# EAGLE board 副机 多路式 v0.1 (EAGLE 6.3)
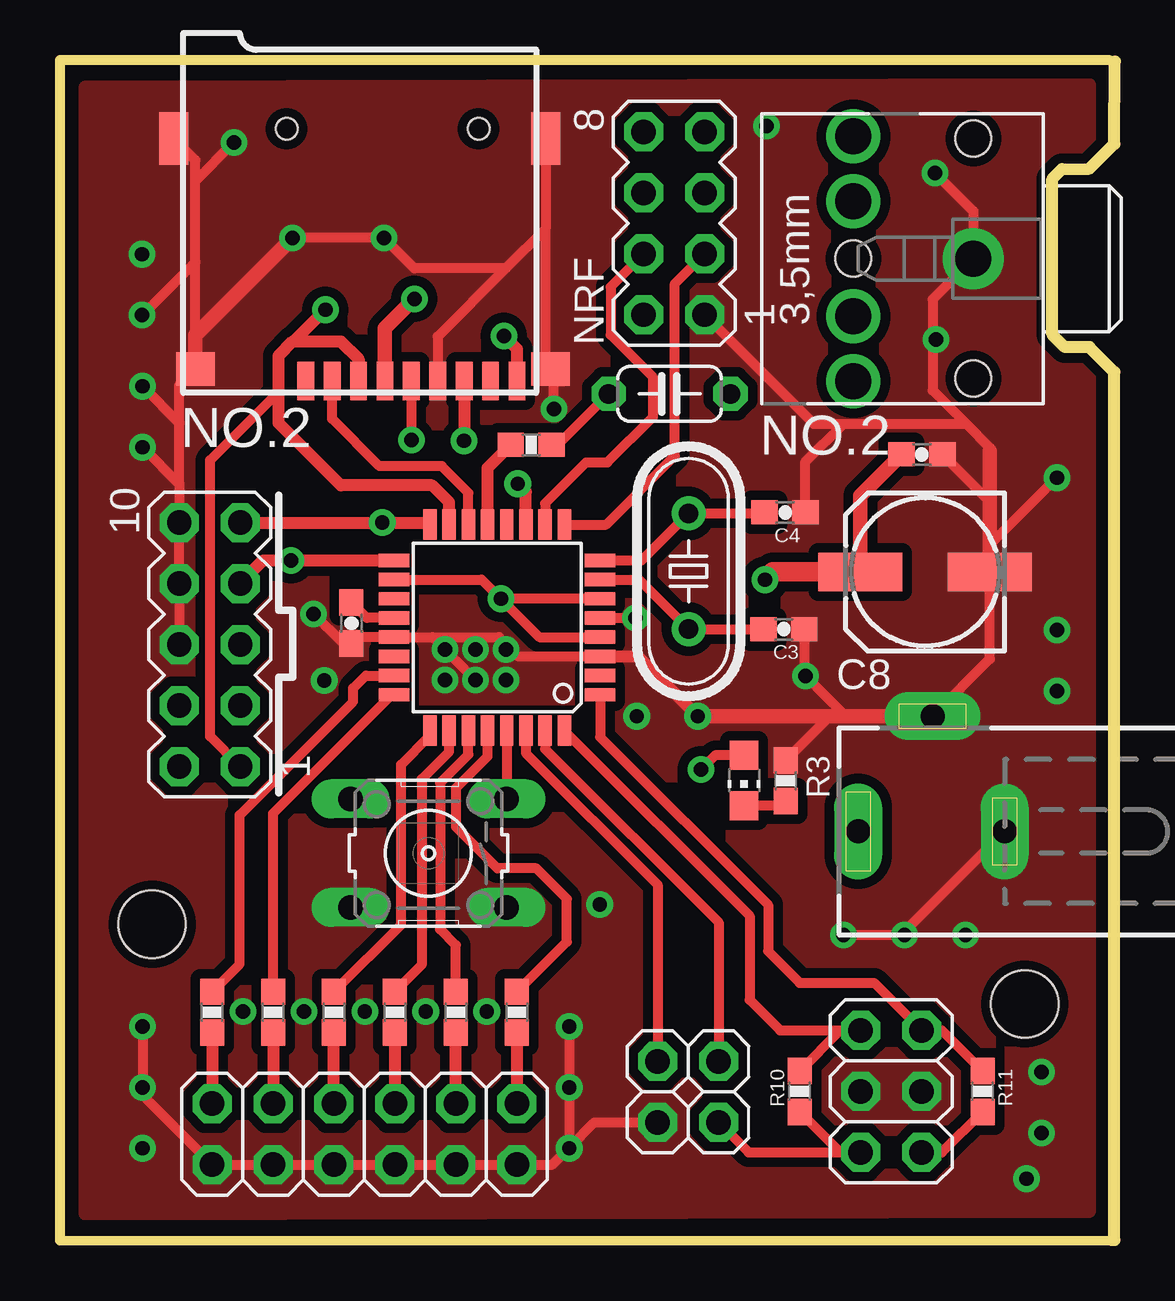
[diagram p0: board, top side]
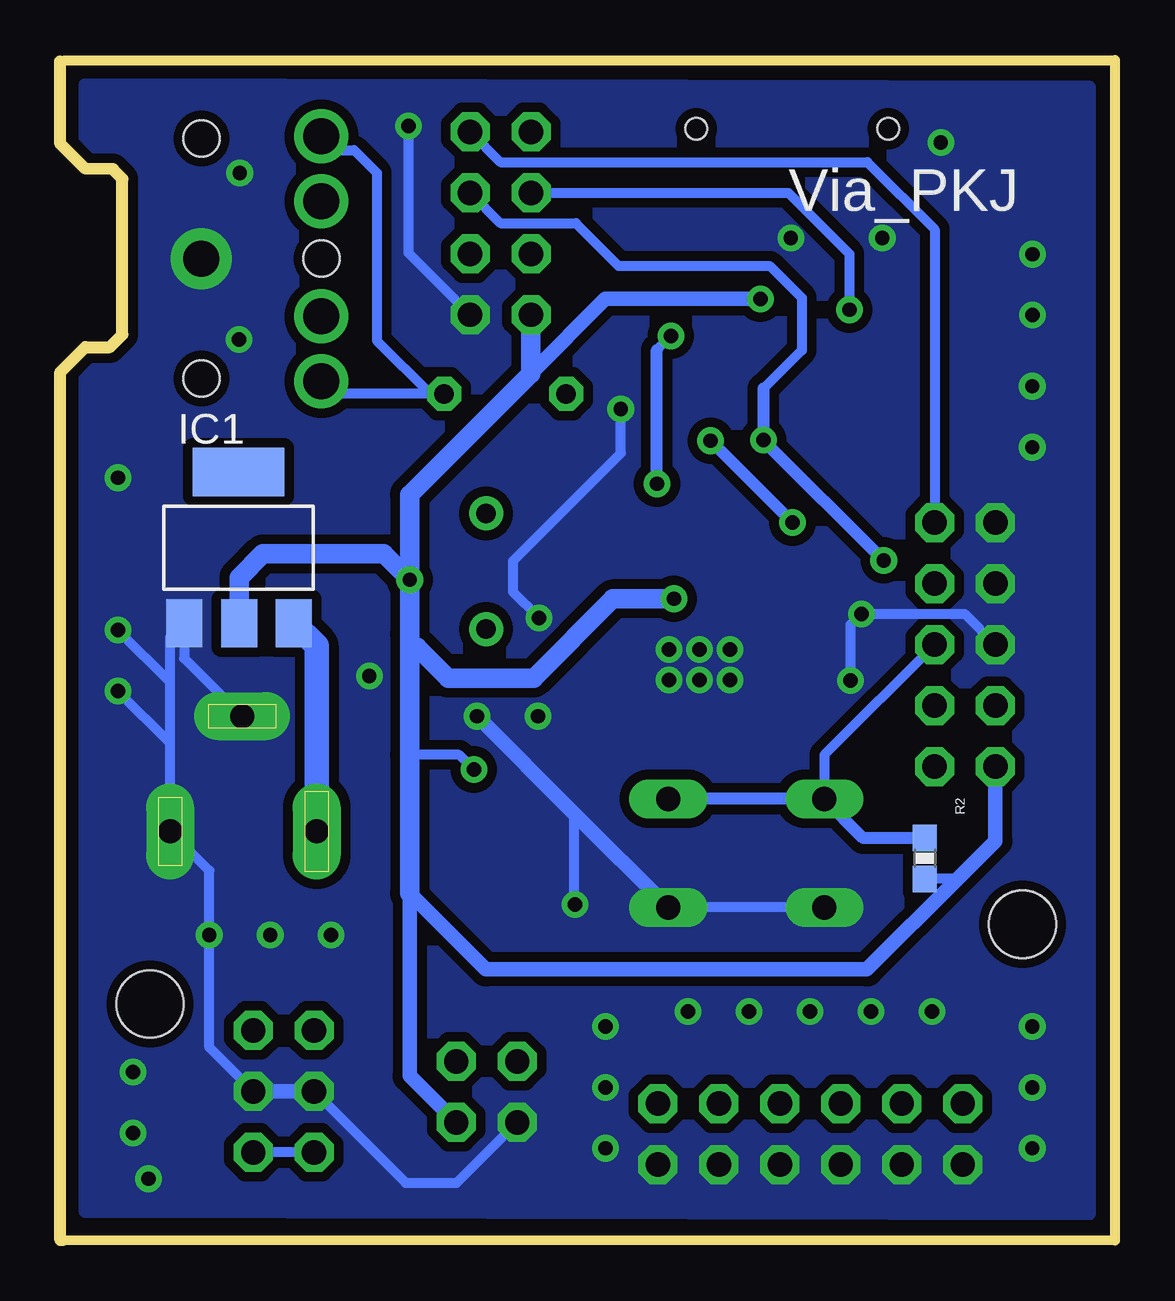
[diagram p1: board, bottom side, seen from below]

Size 43.95 x 49.2 mm. Coordinates in mm from the lower left corner, seen from the top.
Outline: 43.82,0 0,0.02 0,49.2 43.76,49.18
Outline: 43.93,0.04 43.93,36.2 42.89,37.24 41.87,37.24 41.35,37.76 41.35,44.25 41.75,44.65 42.89,44.67 43.93,45.71 43.95,49.15
Copper layers (1*16): Top 0.035mm / dielectric 1.5mm / Bottom 0.035mm
Design rules "SparkFun *": minimum track width 8mil, minimum drill 20mil, track to track 8mil, track to pad 8mil, pad to pad 8mil, via to via 8mil, smd to smd 8mil, copper to edge 10mil, drill to drill 8mil, minimum pad ring 12mil, minimum via ring 10mil, stop-mask expansion 4mil, vias tented up to drill 20mil, thermal gap 10mil
Net classes: 1 power: width 0.381 mm
Holes 2.8 mm at 40.2,9.87 3.84,13.19

## Footprints (pad centres in the part's own frame; a part is rotated, then mirrored left to right if it is on the bottom)
C050-024X044 = drill 0.813 octagon: 1 -2.54,0; 2 2.54,0
0603-RES = smd 1.1 x 1: 1 -0.85,0; 2 0.85,0
0603-CAP = smd 1.1 x 1: 1 -0.85,0; 2 0.85,0
153CLV-0605 = smd 3.5 x 1.6: + 2.7,0; - -2.7,0
SOT223 = smd 1.499 x 2.007: 1 -2.261,-3.15; 2 0.025,-3.15; 3 2.311,-3.15 | smd 3.81 x 2.007: 4 0,3.15
TQFP32-08 = smd 1.27 x 0.559: 1 -4.293,2.8; 2 -4.293,2; 3 -4.293,1.2; 4 -4.293,0.4; 5 -4.293,-0.4; 6 -4.293,-1.2; 7 -4.293,-2; 8 -4.293,-2.8; 17 4.293,-2.8; 18 4.293,-2; 19 4.293,-1.2; 20 4.293,-0.4; 21 4.293,0.4; 22 4.293,1.2; 23 4.293,2; 24 4.293,2.8 | smd 0.559 x 1.27: 9 -2.8,-4.293; 10 -2,-4.293; 11 -1.2,-4.293; 12 -0.4,-4.293; 13 0.4,-4.293; 14 1.2,-4.293; 15 2,-4.293; 16 2.8,-4.293; 25 2.8,4.293; 26 2,4.293; 27 1.2,4.293; 28 0.4,4.293; 29 -0.4,4.293; 30 -1.2,4.293; 31 -2,4.293; 32 -2.8,4.293
DCJ0202 = drill 1 pad 2 long: 1 0,3.1; 2 4.8,0; 3 0,-3
2X03 = drill 1.016 octagon: 1 -2.54,-1.27; 2 -2.54,1.27; 3 0,-1.27; 4 0,1.27; 5 2.54,-1.27; 6 2.54,1.27
2X06 = drill 1.016 octagon: 1 -6.35,-1.27; 2 -6.35,1.27; 3 -3.81,-1.27; 4 -3.81,1.27; 5 -1.27,-1.27; 6 -1.27,1.27; 7 1.27,-1.27; 8 1.27,1.27; 9 3.81,-1.27; 10 3.81,1.27; 11 6.35,-1.27; 12 6.35,1.27
0805-LED = smd 1.2 x 1.2: A 0,-1.05; C 0,1.05
MA04-2 = drill 1.016 octagon: 1 -3.81,-1.27; 2 -3.81,1.27; 3 -1.27,-1.27; 4 -1.27,1.27; 5 1.27,-1.27; 6 1.27,1.27; 7 3.81,-1.27; 8 3.81,1.27
HC49/S = drill 0.813: 1 -2.413,0; 2 2.413,0
B3F-10XX = drill 1.016 long: 1 -3.251,2.261; 2 3.251,2.261; 3 -3.251,-2.261; 4 3.251,-2.261
MA05-2 = drill 1.016 octagon: 1 -5.08,-1.27; 2 -5.08,1.27; 3 -2.54,-1.27; 4 -2.54,1.27; 5 0,-1.27; 6 0,1.27; 7 2.54,-1.27; 8 2.54,1.27; 9 5.08,-1.27; 10 5.08,1.27
MICRO-SD = smd 0.7 x 1.6: 1 2.25,10.5; 2 1.15,10.5; 3 0.05,10.5; 4 -1.05,10.5; 5 -2.15,10.5; 6 -3.25,10.5; 7 -4.35,10.5; 8 -5.45,10.5; CD -6.55,10.5 | smd 1.6 x 1.4: G -7.95,10; P$3 6.85,10 | smd 1.2 x 2.2: P$1 7.75,0.4; P$2 -7.75,0.4 | hole 0.9: 3.05,0; -4.95,0
PIN1 = drill 1.016 octagon: 1 0,0
STX3100 = drill 1.5 pad 2.54: 1 2.7,-0.1 | drill 1.5: 2 7.7,5; 3 7.7,2.3; 4 7.7,-2.5; 5 7.7,-5.2 | hole 1.5: 2.7,4.9; 2.7,-5.1; 7.7,-0.1

## Placement (x,y rotation side)
10U  10u  [C050-024X044]  25.4,35.29 180 top
100  100  [0603-RES]  19.63,33.17 180 top
C1  0.1uf  [0603-CAP]  12.14,25.74 90 top
C2  0.1uf  [0603-CAP]  35.92,32.77 180 top
C3  0.1uf  [0603-CAP]  30.16,25.49 180 top
C4  0.1uf  [0603-CAP]  30.21,30.35 180 top
C8  220uF  [153CLV-0605]  36.05,27.87 180 top
IC1  REG1117  [SOT223]  36.51,28.89 0 bottom
IC2  MEGA8-AI  [TQFP32-08]  18.22,25.55 180 top
J1  DC6~12V  [DCJ0202]  36.36,17.06 90 top
JP1  [2X03]  34.63,6.23 90 top
JP2  [2X06]  12.69,4.45 0 top
LED1  [0805-LED]  28.5,19.18 180 top
NRF  [MA04-2]  25.59,42.4 90 top
Q2  [HC49/S]  26.19,27.9 270 top
R  200  [0603-RES]  6.34,9.53 270 top
R1  200  [0603-RES]  8.88,9.53 270 top
R2  10K  [0603-RES]  7.92,15.94 270 bottom
R3  1K  [0603-RES]  30.23,19.17 270 top
R4  200  [0603-RES]  11.42,9.53 270 top
R5  200  [0603-RES]  13.96,9.53 270 top
R7  200  [0603-RES]  16.5,9.53 270 top
R8  200  [0603-RES]  19.04,9.53 270 top
R10  4.7k  [0603-RES]  30.82,6.23 90 top
R11  4.7k  [0603-RES]  38.44,6.23 270 top
S1  [B3F-10XX]  15.35,16.16 180 top
SV7  [MA05-2]  6.24,24.85 90 top
U$1  MICRO-SD  [MICRO-SD]  12.49,46.34 180 top
U$4  [PIN1]  24.9,4.94 0 top
U$5  [PIN1]  27.44,4.94 0 top
U$6  [PIN1]  27.44,7.48 0 top
U$7  [PIN1]  24.9,7.48 0 top
X1  Sound  [STX3100]  40.75,40.83 180 top

## Library data of the parts
10U C8 = resistor
100 C1-C4 LED1 R R1-R5 R7 R8 R10 R11 U$1 = MY
IC1 = burr-brown; MPN: REG1117; OC_FARNELL: 1097566; OC_NEWARK: 14P6981
IC2 = atmel; MPN: ATMEGA8-16AU; OC_FARNELL: 9171371; OC_NEWARK: 73M8863
J1 = con-jack; OC_FARNELL: unknown; OC_NEWARK: unknown
JP1 JP2 = pinhead
NRF SV7 = con-lstb; OC_FARNELL: unknown; OC_NEWARK: unknown
Q2 = crystal; OC_FARNELL: 1667008; OC_NEWARK: unknown
S1 = switch-omron; MPN: B3F-1000; OC_FARNELL: 176432; OC_NEWARK: 36M3542
U$4-U$7 = pkj
X1 = adafruit

## Nets
A0: IC2.23 R.1
A1: IC2.24 R1.1
A2: IC2.25 R4.1
A3: IC2.26 R5.1
A4: IC2.27 R7.1
A5: IC2.28 R8.1
A6: IC2.19
A7: IC2.22
AREF: C1.2 IC2.20
D0/RXI: IC2.30 U$7.1
D1/TXO: IC2.31 U$6.1
D2/INT0: IC2.32 JP1.6 R10.2
D3/INT1/PMW: IC2.1 JP1.5 R11.1
D4: IC2.2
D5/PWM: IC2.9 NRF.3
D6/PWM: IC2.10 NRF.4
D7: IC2.11 U$1.CD
D8: IC2.12
D9/PWM: 100.2 IC2.13
D10/SS/PWM: IC2.14 U$1.2
D11/MOSI/PWM: IC2.15 NRF.6 SV7.1 U$1.3
D12/MISO: IC2.16 NRF.7 SV7.9 U$1.7
D13/SCK: IC2.17 NRF.5 SV7.7 U$1.5
GND [power]: C1.1 C2.1 C3.1 C4.1 C8.- IC1.1 IC2.3 IC2.5 IC2.21 J1.2 J1.3 JP1.3 JP1.4 JP2.1 JP2.3 JP2.5 JP2.7 JP2.9 JP2.11 NRF.1 R3.1 S1.1 S1.2 SV7.6 SV7.8 SV7.10 U$1.6 U$1.G U$1.P$1 U$1.P$2 U$1.P$3 U$4.1 X1.1
N$1: JP2.2 R.2
N$2: JP2.12 R8.2
N$3: JP2.4 R1.2
N$5: LED1.C R3.2
N$9: JP2.6 R4.2
N$11: JP2.8 R5.2
N$13: JP2.10 R7.2
N$14: 10U.2 100.1
PB6: C3.2 IC2.7 Q2.2
PB7: C4.2 IC2.8 Q2.1
RESET: IC2.29 R2.1 S1.3 S1.4 SV7.5
V3.3: C2.2 C8.+ IC1.2 IC2.4 IC2.6 IC2.18 JP1.1 JP1.2 LED1.A NRF.2 R2.2 R10.1 R11.2 SV7.2 U$1.4 U$5.1
VIN: IC1.3 J1.1
~~: 10U.1 X1.2 X1.5

## Tracks (layer width: path | path; a pad name or v marks a point on that pad's centre or on a via)
A0
  Top 0.406: IC2.23 12.74,23.55 12.22,23.03 12.22,22.47 7.49,17.74 7.49,11.53 R.1
A1
  Top 0.406: R1.1 8.88,17.81 13.82,22.75 IC2.24
A2
  Top 0.406: IC2.25 15.41,21.05 14.21,19.84 14.21,13.17 R4.1
A3
  Top 0.406: IC2.26 16.22,20.39 15.07,19.24 15.07,11.5 R5.1
A4
  Top 0.406: R7.1 16.5,12.32 15.83,12.98 15.83,19.09 17.01,20.27 IC2.27
A5
  Top 0.406: R8.1 21.12,12.46 21.12,14.25 19.85,15.52 18.22,15.52 16.5,17.25 16.5,18.87 17.81,20.19 IC2.28
AREF
  Top 0.406: IC2.20 12.78,25.95 C1.2
D0/RXI
  Top 0.406: IC2.30 19.42,20.33 24.9,14.84 U$7.1
D1/TXO
  Top 0.406: IC2.31 20.21,20.49 27.44,13.27 U$6.1
D2/INT0
  Top 0.406: R10.2 32.51,8.77 JP1.6 30.01,8.77 28.74,10.04 28.74,13.54 IC2.32
D3/INT1/PMW
  Top 0.406: R11.1 36.75,8.77 JP1.5 33.92,10.75 30.82,10.75 29.5,12.07 29.5,14 22.51,20.99 IC2.1
D5/PWM
  Top 0.406: NRF.3 25.62,39.89 25.62,32.71 22.76,29.85 IC2.9
D6/PWM
  Top 0.406: NRF.4 22.94,39.75 22.94,37.75 24.71,35.98 24.71,34.34 22.81,32.43 21.92,32.43 20.21,30.73 IC2.10
D7  (via drill 0.6)
  Top 0.508: IC2.11 19.42,31.21 v19.07,31.55 | v18.49,37.71 19.04,37.16 U$1.CD
  Bottom 0.406: 19.07,37.13 v18.49,37.71
  Bottom 0.508: v19.07,31.55 19.07,37.13
D9/PWM
  Top 0.508: IC2.13 17.81,32.21 100.2
D10/SS/PWM
  Top 0.406: IC2.14 17.01,31.17 15.91,32.28 13.31,32.28 11.34,34.25 U$1.2
D11/MOSI/PWM  (via drill 0.6)
  Top 0.406: SV7.1 6.26,21.02 6.26,32.53 9.11,35.38 | 9.74,37.48 9.71,37.48
  Top 0.508: IC2.15 16.22,30.77 15.51,31.48 11.71,31.48 9.11,34.08 9.11,35.38 9.11,36.88 9.71,37.48 | U$1.3 12.44,36.75 11.71,37.48 9.74,37.48 v11.06,38.8
  Bottom 0.406: NRF.6 13.6,43.67 11.06,41.13 v11.06,38.8
D12/MISO  (via drill 0.6)
  Top 0.406: 15.41,29.93 IC2.16
  Top 0.508: SV7.9 v13.43,29.93 15.41,29.93 | U$1.7 v16.84,33.34
  Bottom 0.406: NRF.7 25.6,44.95 10.31,44.95 7.51,42.15 SV7.9
  Bottom 0.508: v16.84,33.34 v13.43,29.93
D13/SCK  (via drill 0.6)
  Top 0.406: U$1.5 v14.64,33.37
  Top 0.508: SV7.7 8.48,28.35 v9.63,28.35 IC2.17
  Bottom 0.406: NRF.5 25.6,42.41 22.46,42.41 20.68,40.63 14.38,40.63 13.04,39.29 13.04,37.11 14.64,35.51
  Bottom 0.508: v9.63,28.35 v14.64,33.37 14.64,35.51
GND  (via drill 0.6)
  Top 0.406: J1.2 38.75,24.25 C8.- | 15.53,25.15 IC2.21 12.14,25.15 C1.1 11.79,24.89 v10.56,26.13 | 15.53,25.15 18.28,25.15 19.07,24.37 23,24.37 | IC2.5 v23.99,25.95 | SV7.6 SV7.8 SV7.10 4.97,31.54 | 4.97,31.54 4.97,34.08 | 4.97,34.08 4.97,35.67 U$1.P$3 5.64,40.79 | 5.64,40.79 5.64,44.16 | 5.64,44.16 5.64,45.04 U$1.P$1 | U$1.P$2 20.24,42.18 | 20.24,42.18 18.58,40.52 | 18.58,40.52 15.74,37.68 U$1.6 | U$1.G 20.24,36.54 20.24,42.18 | v17.31,23.37 15.53,25.15 | v3.42,38.57 5.64,40.79 | v9.69,41.79 v13.5,41.79 14.77,40.52 18.58,40.52 | 21.22,3.89 20.51,3.18 JP2.11 JP2.9 JP2.7 JP2.5 JP2.3 JP2.1 3.44,6.08 v3.44,8.94 | 21.22,3.89 22.27,4.94 U$4.1 | R3.1 32.07,21.86 32.55,21.86 | U$1.G 20.97,35.81 20.58,35.81 v20.58,34.66 | 37.75,34.04 36.36,35.44 36.36,39.23 X1.1 38.05,42.9 v36.46,44.5 | 37.75,34.04 38.75,33.05 38.75,32.9 | v3.44,35.61 4.97,34.08 | v3.44,33.07 4.97,31.54 | v21.22,8.94 21.22,3.89 | v32.65,12.75 35.04,12.75 J1.3 | 32.74,21.86 v31.06,23.54 31.01,23.6 C3.1 | v41.54,31.8 38.75,29.01 C8.- | v7.25,45.77 5.64,44.16 | C2.1 38.75,30.79 C8.- | NRF.1 31.4,34.04 32.65,34.04 | 32.65,34.04 37.75,34.04 | C4.1 31.06,32.46 32.65,34.04 | 20.58,36.34 U$1.G
  Top 0.508: IC2.3 24.08,24.35 v26.57,21.86
  Top 0.61: 38.75,27.99 C8.- 38.75,32.9 | v9.69,41.79 5.64,37.74 U$1.P$3 | v26.57,21.86 32.55,21.86 32.74,21.86 J1.2
  Bottom 0.406: SV7.6 6.25,26.13 v10.56,26.13 11.01,25.68 v11.01,23.35 | J1.2 38.77,24.28 IC1.1 39.36,25.15 39.36,23.27 | 39.36,20.73 J1.3 37.73,15.43 37.73,8.06 JP1.3 | 39.36,20.73 39.36,23.27 | JP1.4 29.55,2.42 27.42,2.42 U$4.1 | S1.2 S1.1 | v41.54,25.45 39.36,23.27 | v41.54,22.91 39.36,20.73 | v22.49,14.02 22.51,14.04 22.51,17.8 | v23.99,25.95 25.08,27.05 25.08,28.33 20.58,32.82 v20.58,34.66 | v29.44,46.45 29.44,41.17 NRF.1
  Bottom 0.61: JP1.3 JP1.4 | S1.1 22.51,17.8 v26.57,21.86
  other vias: 7.62,9.56 10.16,9.56 12.7,9.56 15.24,9.56 17.78,9.56 35.19,12.75 37.73,12.75 3.42,41.11 24.03,21.86 3.44,6.4 3.44,3.86 21.22,6.4 21.22,3.86 40.27,2.59 40.9,4.49 40.9,7.03 36.49,37.56 16.04,23.37 18.58,23.37 16.04,24.64 17.31,24.64 18.58,24.64
  pour Bottom (isolate 0.406, no thermals): 42.87,48.15 1.08,48.04 1.08,1.15 42.87,1.25
  pour Top (isolate 0.406, no thermals): 42.87,48.15 1.08,48.04 1.08,1.15 42.87,1.25
N$1
  Top 0.508: R.2 JP2.2
N$2
  Top 0.508: R8.2 JP2.12
N$3
  Top 0.508: R1.2 JP2.4
N$5
  Top 0.406: R3.2 30.04,18.13 LED1.C
N$9
  Top 0.508: JP2.6 R4.2
N$11
  Top 0.508: R5.2 JP2.8
N$13
  Top 0.508: JP2.10 R7.2
N$14
  Top 0.406: 10U.2 20.74,33.17 100.1
PB6
  Top 0.406: IC2.7 24.13,27.55 Q2.2 C3.2
PB7
  Top 0.406: IC2.8 24.23,28.35 Q2.1 29.32,30.31 C4.2
RESET
  Top 0.406: IC2.29 S1.3
  Bottom 0.406: SV7.5 12.1,20.25 S1.4
  Bottom 0.508: R2.1 10.47,16.79 S1.4 S1.3
V3.3  (via drill 0.6)
  Top 0.406: IC2.18 17.57,27.55 v18.37,26.75 | v18.37,26.75 19.97,25.15 IC2.4 | R10.1 32.51,3.69 JP1.2 28.69,3.69 U$5.1 | R11.2 36.75,3.69 JP1.1 | LED1.A 27.3,20.23 v26.71,19.64 | IC2.6 v18.37,26.75
  Top 0.61: U$1.4 13.54,38.02 v14.77,39.25 | C2.2 33.35,31.05 C8.+
  Top 0.813: v29.38,27.55 29.7,27.87 C8.+
  Bottom 0.406: R2.2 8.11,15.12 6.51,15.12 | JP1.2 JP1.1 | v26.71,19.64 27.32,20.25 29.38,20.25 | 29.06,24.73 29.38,25.28
  Bottom 0.61: SV7.2 4.97,16.66 6.51,15.12 10.32,11.31 26.2,11.31 29.38,14.49 29.38,6.88 U$5.1 | v14.77,39.25 21.22,39.25 24.34,36.12 | NRF.2 24.34,38.56
  Bottom 0.813: IC1.2 36.49,27.64 35.5,28.63 30.46,28.63 v29.38,27.55 | v29.38,27.55 29.38,31.09 24.34,36.12 24.34,38.56 | v29.38,27.55 29.38,25.28 29.38,20.25 29.38,14.49 | v18.37,26.75 20.91,26.75 24.22,23.45 27.77,23.45 29.06,24.73
VIN
  Bottom 1.016: IC1.3 33.26,24.79 J1.1
~~
  Bottom 0.406: X1.2 32.52,35.29 10U.1 28.52,35.29 30.74,37.51 30.74,44.5 31.7,45.45 32.48,45.45 X1.5

## Text on the board
tPlace: NO.2 | NO.2
bPlace: Via_PKJ